# Altium PCB PCB1.PcbDoc
Units mm, origin at the board's own origin, x right, y up, seen from the top; angles counter-clockwise.
Board outline 152.4 x 101.6 mm, 2 copper layers (Top Layer, Bottom Layer); 27 components, 91 nets, 283 pads, 63 vias.
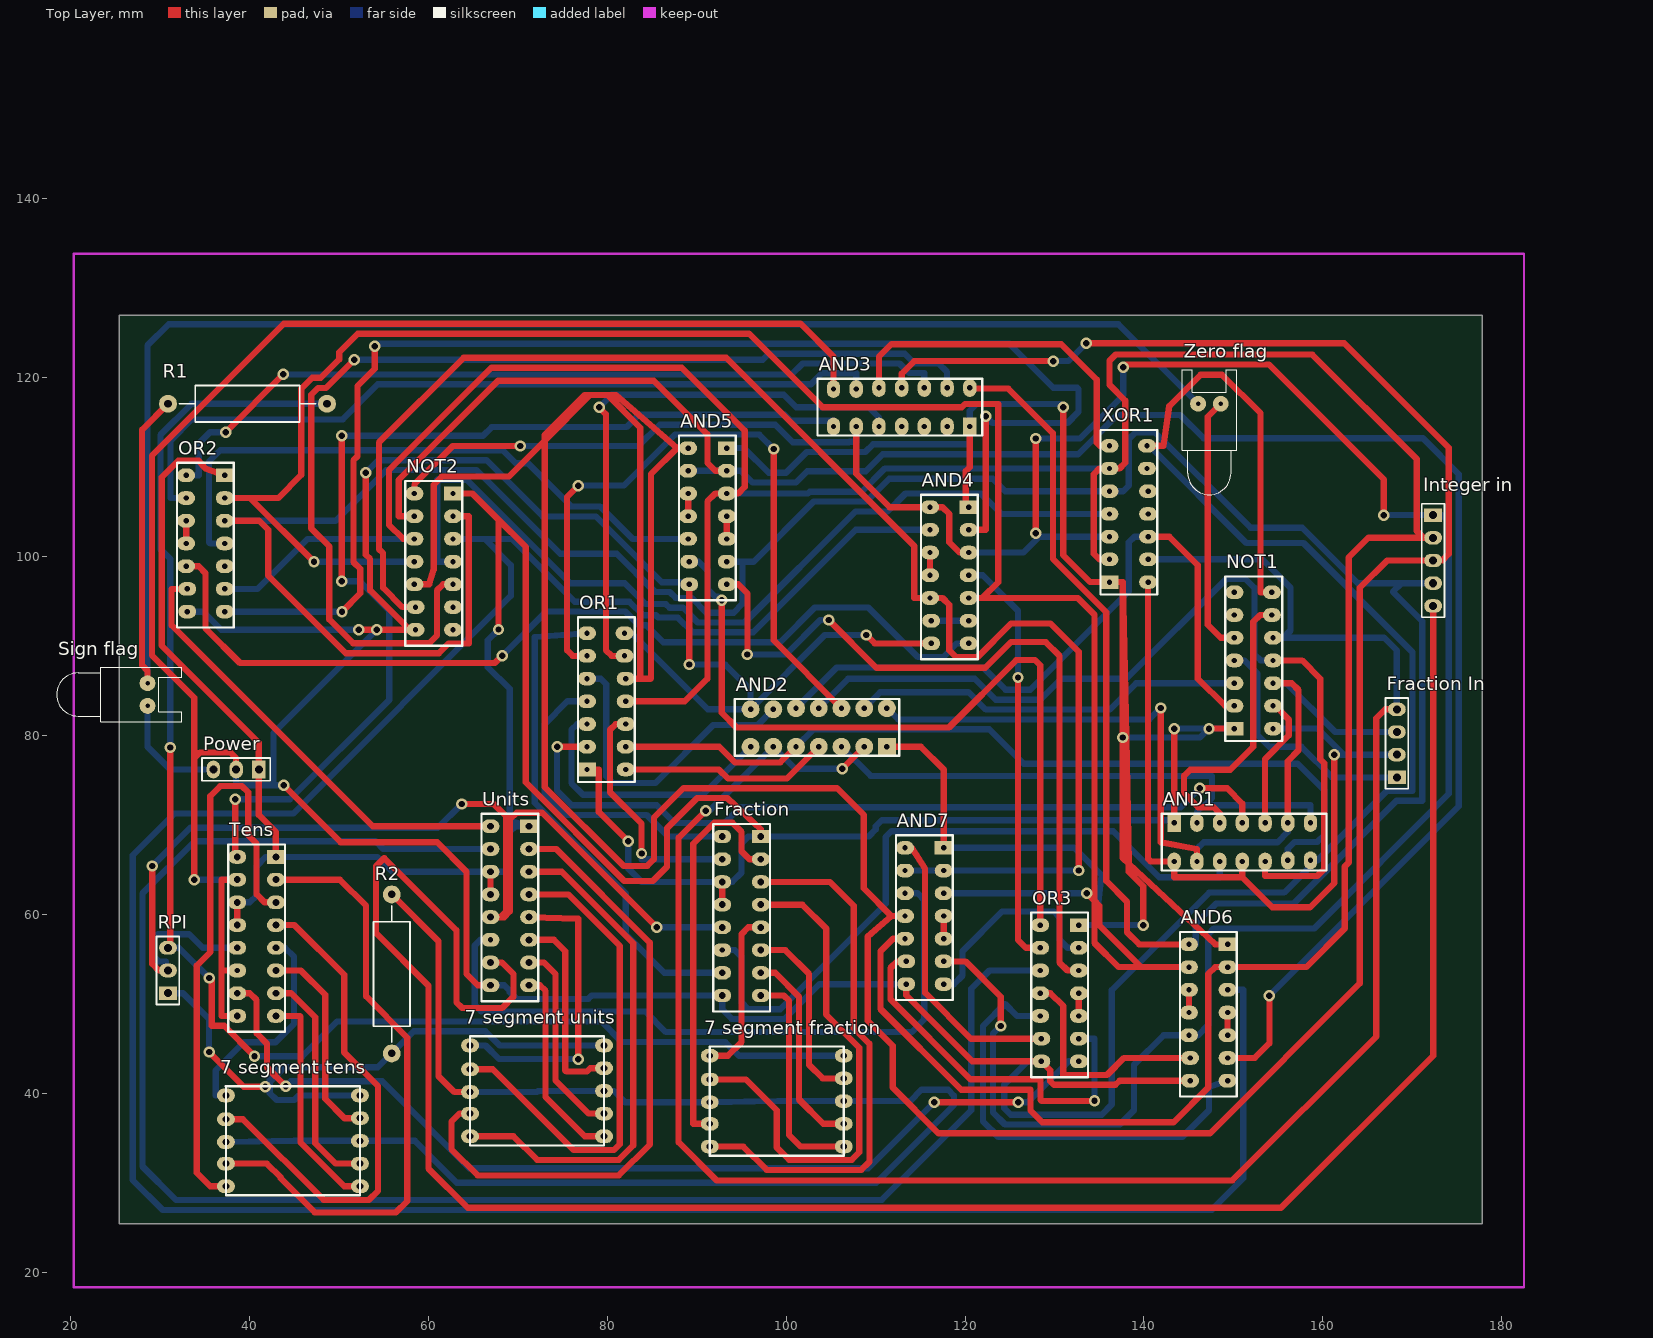
[diagram p0: Top Layer view]
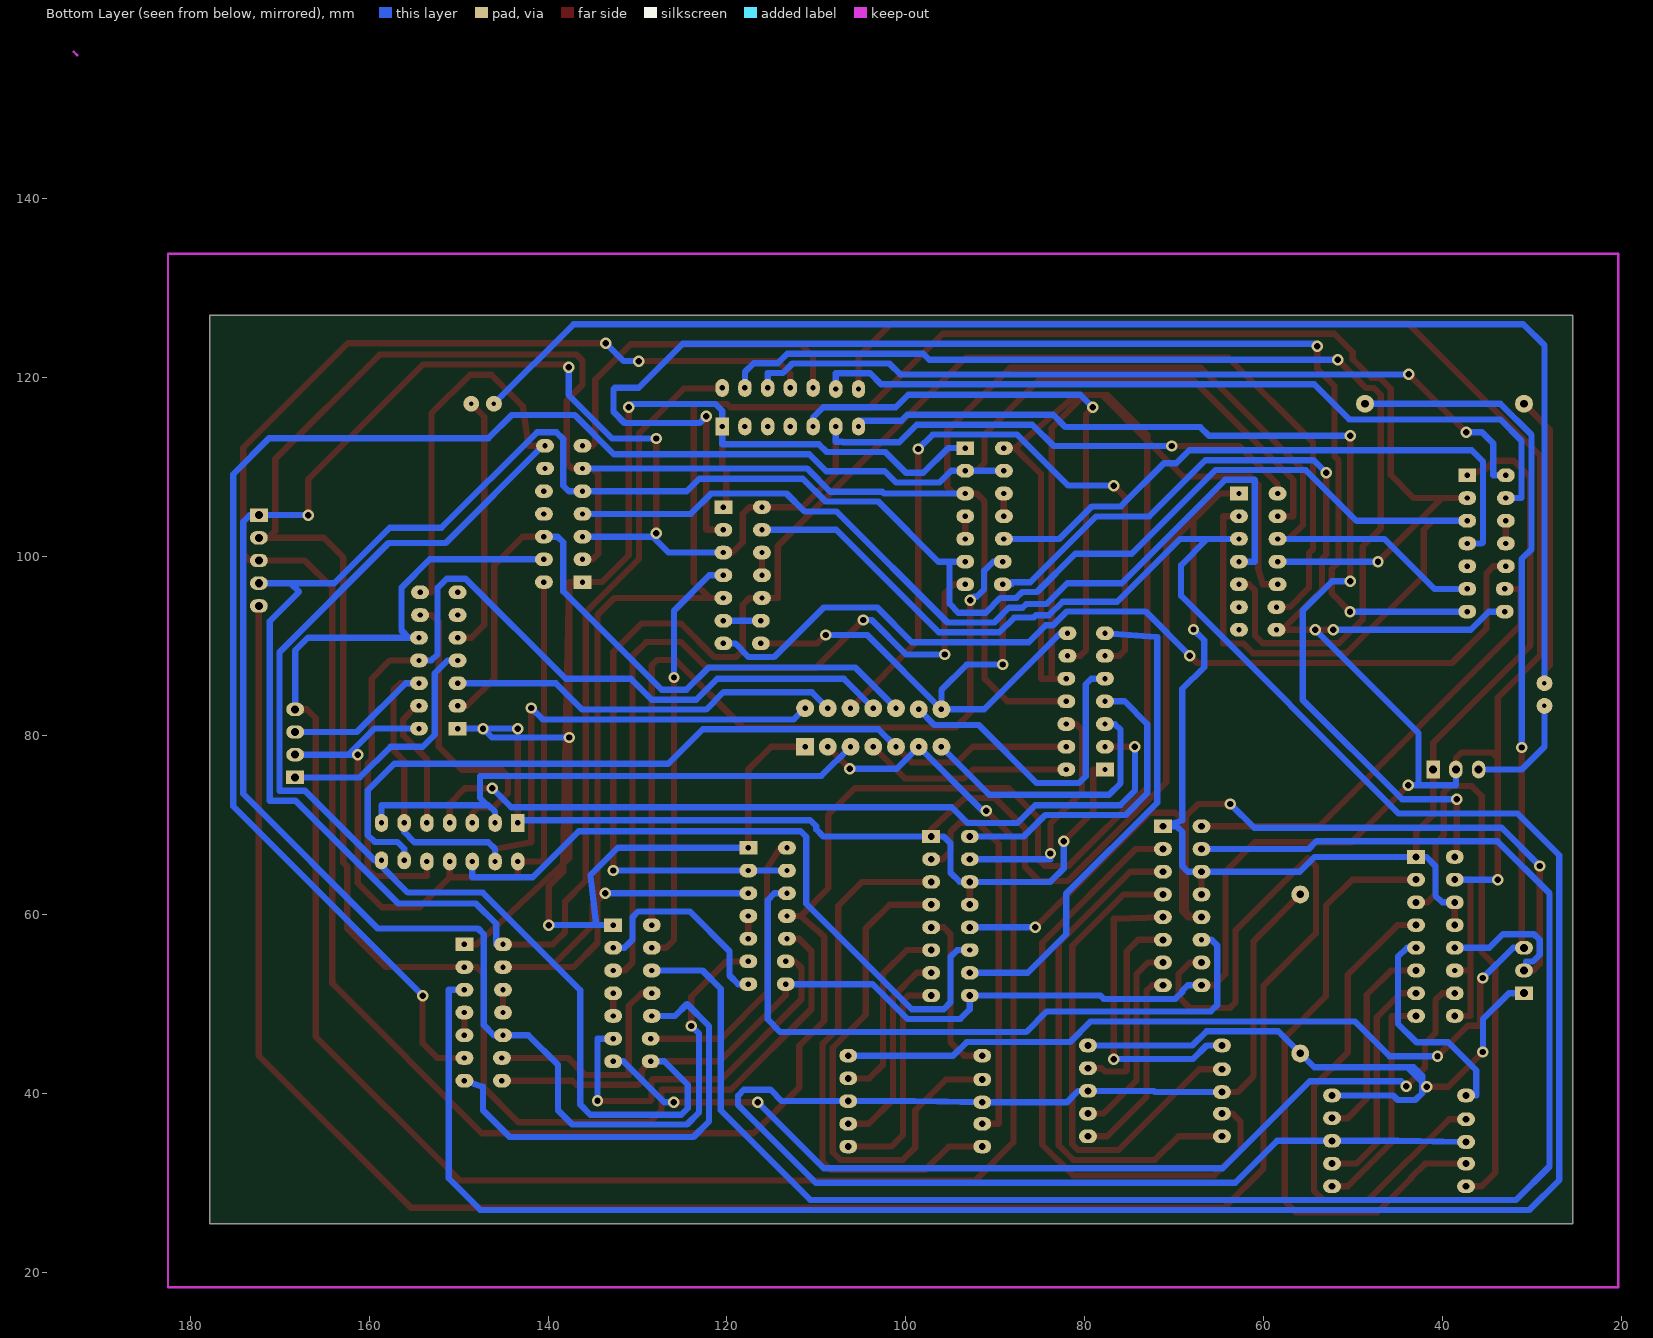
[diagram p1: Bottom Layer view, seen from below]

## Layer stack, top to bottom
Top Solder: solder mask 0.0102, Solder Resist, Dk 3.5
Top Layer: signal copper 0.0356
Dielectric 1: dielectric 0.32, FR-4, Dk 4.8
Bottom Layer: signal copper 0.0356
Bottom Solder: solder mask 0.0102, Solder Resist, Dk 3.5

## Board outline
25.4,25.4 177.8,25.4 177.8,127 25.4,127

## Design rules (kind name [scope] priority, off if disabled: settings)
Clearance [All] p1: gap=0.4 ignorepadtopadclearanceinfootprint=FALSE
HoleSize [All] p1: absolutevalues=TRUE maxlimit=2.54 minlimit=2 maxpercent=80.000 minpercent=20.000
PolygonConnect [All] p1: connectstyle=Relief reliefconductorwidth=0.254 reliefentries=4 polygonreliefangle="90 Angle" airgapwidth=0.254
RoutingVias [All] p1: holewidth=0.711 width=1.27 viastyle="Through Hole" minholewidth=0.711 minwidth=1.27 maxholewidth=0.711 maxwidth=1.27
SolderMaskExpansion [All] p1: expansion=0.102
Width [All] p1: maxlimit=1 minlimit=0.5 preferedwidth=0.7 minimp=50.000000 maximp=50.000000 favimp=50.000000
29 further rules are at their usual default settings.

## Components (designator, comment, footprint, x,y, rotation, side; value= is the part's Value field where it differs from the comment)
"7 segment fraction" "Component_1" "7 segment"#1 89.916,37.465 r90 top
"7 segment tens" "Component_1" "7 segment"#2 35.814,33.02 r90 top
"7 segment units" "Component_1" "7 segment"#2 63.119,38.608 r90 top
AND1 "Component_1" Gate?#1 143.891,67.691 r90 top
AND2 "Component_1" Gate?#2 110.744,81.28 r270 top
AND3 "Component_1" Gate?#1 120.015,117.094 r270 top
AND4 "Component_1" Gate?#3 117.856,105.029 r0 top
AND5 "Component_1" Gate?#3 90.805,111.633 r0 top
AND6 "Component_1" Gate?#3 146.812,56.134 r0 top
AND7 "Component_1" Gate?#3 115.062,66.929 r0 top
Fraction "Component_1" 7483#1 94.615,65.659 r0 top
"Fraction In" "Header 4" HDR1X4 168.275,75.311 r90 top
"Integer in" "Header 5" HDR1X5 172.339,104.648 r270 top
NOT1 "Component_1" Gate?#3 152.654,81.28 r180 top
NOT2 "Component_1" Gate?#3 60.198,106.553 r0 top
OR1 "Component_1" Gate?#3 80.264,76.708 r180 top
OR2 "Component_1" Gate?#3 34.671,108.585 r0 top
OR3 "Component_1" Gate?#3 130.175,58.293 r0 top
Power "Header 3" HDR1X3#1 41.021,76.2 r180 top
R1 "Res Adj1" AXIAL-0.7 39.751,117.094 r0 top value=1K
R2 "Res Adj1" AXIAL-0.7 55.88,53.34 r270 top value=1K
RPI "Header 3" HDR1X3#2 30.861,51.181 r90 top
"Sign flag" "LED0" LED-0 28.575,84.582 r270 top
Tens "Component_1" 7483#2 40.386,63.373 r0 top
Units "Component_1" 7483#3 68.707,66.802 r0 top
XOR1 "Component_1" Gate?#1 138.684,97.663 r180 top
"Zero flag" "LED0" LED-0 147.32,117.094 r0 top

## Footprints (in the part's own frame and the unit in brackets; to place one, negate y for a bottom-side part, rotate by r counter-clockwise, add the part's x,y. Pads: shape width x height; smd on the part's side, far side on the other; paste and mask are expansions set on the pad)
"7 segment"#1 [mil]
  oval 59.06x78.74 hole 30: a(160,-60) b(265,-60) c(165,-650) com(60,-60) com(65,-650) d(-35,-650) DP(265,-650) e(-135,-650) f(-35,-60) g(-135,-60)
  silkscreen extent -175,-650 305,-59
"7 segment"#2 [mil]
  oval 60x78.74 hole 30: a(160,-60) b(265,-60) c(165,-650) com(60,-60) com(65,-650) d(-35,-650) DP(265,-650) e(-135,-650) f(-35,-60) g(-135,-60)
  silkscreen extent -175,-650 305,-59
7483#1 [mil]
  oval 78.74x59.06 hole 30: A1(100,-480) A2(-70,-580) A3(-70,-80) A4(-70,120) B1(100,-380) B2(-70,-480) B3(-70,-180) C0(100,-180) C1(100,-580) C3(-70,20) C4(100,20) C5(100,-80) GND(100,-280) Vcc(-70,-280)
  rect 78.74x59.06 hole 30: B4(100,120)
  oval 78.74x59.06 hole 23.62: C2(-70,-380)
  silkscreen extent -110,-650 140,175
7483#2 [mil]
  oval 78.74x60 hole 30: A1(100,-480) A2(-70,-580) A3(-70,-80) A4(-70,120) B1(100,-380) B2(-70,-480) B3(-70,-180) C0(100,-180) C1(100,-580) C3(-70,20) C4(100,20) C5(100,-80) GND(100,-280) Vcc(-70,-280)
  rect 78.74x60 hole 30: B4(100,120)
  oval 78.74x60 hole 23.62: C2(-70,-380)
  silkscreen extent -110,-650 140,175
7483#3 [mil]
  oval 78.74x60.63 hole 30: A1(100,-480) A2(-70,-580) A3(-70,-80) A4(-70,120) B1(100,-380) B2(-70,-480) B3(-70,-180) C0(100,-180) C1(100,-580) C3(-70,20) C4(100,20) C5(100,-80) GND(100,-280) Vcc(-70,-280)
  rect 78.74x60.63 hole 30: B4(100,120)
  oval 78.74x60.63 hole 23.62: C2(-70,-380)
  silkscreen extent -110,-650 140,175
AXIAL-0.7 [mm] "Axial Device, Thru-Hole; 2 Leads; 0.7 in Pin Spacing"
  round 2 hole 0.85: 1(-8.89,0) 2(8.89,0)
  silkscreen extent -7.62,-2.03 7.62,2.03
Gate?#1 [mm]
  oval 2x1.5 hole 0.6: 1(-1.778,0.508) 2(-1.778,-2.032) 3(-1.778,-4.572) 4(-1.778,-7.112) 5(-1.778,-9.652) 6(-1.651,-12.192) 7(-1.651,-14.732) 8(2.54,-14.732) 9(2.54,-12.192) 10(2.54,-9.652) 11(2.54,-7.112) 12(2.54,-4.572) 13(2.54,-2.032)
  rect 2x1.5 hole 0.6: 14(2.54,0.508)
  silkscreen extent -2.79,-16.51 3.56,1.91
Gate?#2 [mm]
  round 2 hole 0.6: 1(-1.778,0.508) 2(-1.778,-2.032) 3(-1.778,-4.572) 4(-1.778,-7.112) 5(-1.778,-9.652) 6(-1.651,-12.192) 7(-1.651,-14.732) 8(2.54,-14.732) 9(2.54,-12.192) 10(2.54,-9.652) 11(2.54,-7.112) 12(2.54,-4.572) 13(2.54,-2.032)
  rect 2x2 hole 0.6: 14(2.54,0.508)
  silkscreen extent -2.79,-16.51 3.56,1.91
Gate?#3 [mm]
  oval 2x1.524 hole 0.6: 1(-1.778,0.508) 2(-1.778,-2.032) 3(-1.778,-4.572) 4(-1.778,-7.112) 5(-1.778,-9.652) 6(-1.651,-12.192) 7(-1.651,-14.732) 8(2.54,-14.732) 9(2.54,-12.192) 10(2.54,-9.652) 11(2.54,-7.112) 12(2.54,-4.572) 13(2.54,-2.032)
  rect 2x1.524 hole 0.6: 14(2.54,0.508)
  silkscreen extent -2.79,-16.51 3.56,1.91
HDR1X3#1 [mm] "Connector; Header; 3 Position"
  rect 1.5x2 hole 0.9: 1(0,0)
  oval 1.5x2 hole 0.9: 2(2.54,0) 3(5.08,0)
  silkscreen extent -1.27,-1.27 6.35,1.27
HDR1X3#2 [mm] "Connector; Header; 3 Position"
  rect 1.54x2 hole 0.9: 1(0,0)
  oval 1.54x2 hole 0.9: 2(2.54,0) 3(5.08,0)
  silkscreen extent -1.27,-1.27 6.35,1.27
HDR1X4 [mm] "Connector; Header; 4 Position"
  rect 1.5x2 hole 0.9: 1(0,0)
  oval 1.5x2 hole 0.9: 2(2.54,0) 3(5.08,0) 4(7.62,0)
  silkscreen extent -1.27,-1.27 8.89,1.27
HDR1X5 [mm] "Connector; Header; 5 Position"
  rect 1.5x2 hole 0.9: 1(0,0)
  oval 1.5x2 hole 0.9: 2(2.54,0) 3(5.08,0) 4(7.62,0) 5(10.16,0)
  silkscreen extent -1.27,-1.27 11.43,1.27
LED-0 [mil] "LED; 2 Leads"
  round 70 hole 19.68: 1(50,0) 2(-50,0)
  silkscreen extent -120,-400 120,150

## Part data
"Fraction In": "Header, 4-Pin", LatestRevisionDate=17-Jul-2002, LatestRevisionNote="Re-released for DXP Platform.", Publisher="Altium Limited"
"Integer in": "Header, 5-Pin", LatestRevisionDate=17-Jul-2002, LatestRevisionNote="Re-released for DXP Platform.", Publisher="Altium Limited"
Power RPI: "Header, 3-Pin", LatestRevisionDate=17-Jul-2002, LatestRevisionNote="Re-released for DXP Platform.", Publisher="Altium Limited"
R1 R2: "Variable Resistor", LatestRevisionDate=17-Jul-2002, LatestRevisionNote="Re-released for DXP Platform.", PackageDescription="Axial Device, Thru-Hole; 2 Leads; 0.7 in Pin Spacing", PackageReference=AXIAL-0.7, Published=8-Jun-2000, Publisher="Altium Limited", Set Position=0.5
"Sign flag" "Zero flag": "Typical INFRARED GaAs LED", LatestRevisionDate=08-Jul-2005, LatestRevisionNote="Mech Layer 1 removed.", PackageDescription="LED; 2 Leads", PackageReference=LED-0, Published=8-Jun-2000, Publisher="Altium Limited"

## Via types
v1: diameter 1.27, hole 0.711, Top Layer to Bottom Layer, 63 vias

## Nets (pads, with @x,y where several pads share a name; then routed paths per layer and width w, separated by ;. In a path a pad name is that pad's centre, name@x,y a point inside that pad or via, vN(x,y) a via of type N, cw(c..) or ccw(c..) an arc to the next point about the centre after c; other vN are vias at no path point)
0v: "7 segment fraction.DP" R1.2 RPI.3 | length 164.9
  Top Layer w0.7: RPI.3 31.115,56.261 v1(31.115,78.664) ; v1(35.458,52.883) 35.476,52.883 35.755,52.603 35.755,47.541 37.143,47.541 v1(40.538,44.145)
  Bottom Layer w0.7: RPI.3 32.08,56.261 v1(35.458,52.883) ; v1(31.115,78.664) 31.115,99.746 30.023,100.838 30.023,113.614 33.503,117.094 R1.2 ; v1(40.538,44.145) 45.898,44.145 49.784,48.031 79.324,48.031 81.636,45.72 93.193,45.72 94.717,44.196 106.426,44.196
2: Fraction.C3 OR1.3 | length 27
  Top Layer w0.7: OR1.3 80.924,81.28 80.289,80.645 80.289,73.66 83.82,70.13 v1(83.82,66.802)
  Bottom Layer w0.7: v1(83.82,66.802) 83.82,66.167 Fraction.C3
3: Fraction.A4 OR1.11 | length 35.4
  Bottom Layer w0.7: OR1.11 75.526,83.82 72.986,81.28 72.986,73.535 75.413,71.108 84.379,71.108 86.78,68.707 Fraction.A4
5v: "7 segment tens.DP" "7 segment units.DP" R2.2 RPI.1 | length 73.1
  Top Layer w0.7: v1(35.458,44.602) 39.345,40.716 v1(41.732,40.716)
  Bottom Layer w0.7: RPI.1 32.537,51.181 35.458,48.26 v1(35.458,44.602) ; v1(41.732,40.716) 42.24,41.224 ; 52.324,39.751 45.511,39.751 45.009,39.249 42.996,39.249 42.24,40.005 42.24,41.224 ; 79.629,45.339 67.949,45.339 66.36,46.928 58.358,46.928 R2.2 54.331,42.901 43.917,42.901 ; 42.24,41.224 43.917,42.901 ; 42.24,41.224 42.24,41.961 43.18,42.901 43.917,42.901
"7 seg led": "7 segment fraction.com" "7 segment tens.com" "7 segment units.com" R2.1 | length 170.2
  Top Layer w0.7: R2.1 61.112,56.998 61.112,41.91 62.89,40.132 64.643,40.132
  Bottom Layer w0.7: 37.338,34.544 44.958,34.671 52.324,34.671 58.471,34.671 63.144,29.997 110.072,29.997 118.745,38.671 118.745,39.739 118.11,40.374 115.113,40.374 113.855,39.116 106.426,39.116 99.06,39.116 91.44,38.989 81.966,38.989 80.696,40.259 79.629,40.259 72.263,40.259 72.136,40.132 64.643,40.132
(~Y&~X)+Z: AND4.13 OR2.8 | length 154.2
  Top Layer w0.7: v1(50.317,93.853) 52.363,95.898 52.363,98.642 51.599,99.405 51.599,110.757 52.045,111.203 52.045,119.075 53.975,121.006 v1(53.975,123.546) ; AND4.13 122.301,102.997 v1(122.301,115.697)
  Bottom Layer w0.7: OR2.8 v1(50.317,93.853) ; v1(53.975,123.546) 54.227,123.798 124.927,123.798 129.851,118.874 132.535,118.874 132.675,118.734 132.675,116.176 131.445,114.946 123.052,114.946 v1(122.301,115.697)
(~Z+X)&Y&~MSB: AND5.6 OR3.1 | length 87.9
  Top Layer w0.7: v1(92.786,95.123) 92.786,82.55 94.437,80.899 118.194,80.899 125.73,88.435 127.821,88.435 128.397,87.859 OR3.1
  Bottom Layer w0.7: AND5.6 90.221,99.441 91.237,98.425 91.237,96.342 92.075,95.504 92.405,95.504 v1(92.786,95.123)
"A out": OR2.3 OR2.4 | length 2.5
  Top Layer w0.7: OR2.4 OR2.3
C1: OR2.6 Units.A4 | length 50.8
  Top Layer w0.7: OR2.6 31.267,96.393 31.267,92.329 53.746,69.85 Units.A4
C2: OR3.3 Units.C3 | length 192.8
  Bottom Layer w0.7: Units.C3 54.94,67.31 54.077,68.174 33.839,68.174 28.011,62.346 28.011,31.806 31.75,28.067 110.664,28.067 120.697,38.1 120.697,51.688 122.729,53.721 OR3.3
C3: AND7.3 Units.C2 | length 76.6
  Bottom Layer w0.7: Units.C2 65.811,57.15 65.176,56.515 65.176,49.86 65.888,49.149 84.234,49.149 86.546,46.838 114.021,46.838 115.443,48.26 115.443,61.595 114.681,62.357 AND7.3
C3/~Y: AND7.1 OR3.6 | length 32.5
  Top Layer w0.7: AND7.1 114.046,67.437 115.519,65.126 115.519,51.227 120.645,46.101 OR3.6
C4: OR3.8 Tens.B2 | length 111.4
  Top Layer w0.7: Tens.B2 40.005,51.181 40.767,50.419 40.767,46.698 41.937,45.528 41.937,42.874 v1(44.044,40.767) ; v1(116.563,38.989) v1(125.933,38.989)
  Bottom Layer w0.7: v1(44.044,40.767) 44.602,41.326 54.813,41.326 64.541,31.598 109.172,31.598 v1(116.563,38.989) ; v1(125.933,38.989) 127,38.989 131.572,43.561 OR3.8
C4-YZ: OR3.10 OR3.11 | length 2.5
  Top Layer w0.7: OR3.10 OR3.11
C5: AND3.8 Tens.A4 | length 118.3
  Top Layer w0.7: v1(38.379,72.873) 38.379,66.421 Tens.A4 ; v1(50.288,97.257) v1(50.288,113.513)
  Bottom Layer w0.7: v1(38.379,72.873) 44.501,72.873 55.601,83.972 55.601,93.98 52.324,97.257 v1(50.288,97.257) ; v1(50.288,113.513) 66.089,113.513 67.068,114.491 82.132,114.491 83.5,115.859 99.83,115.859 100.482,115.207 105.283,115.207 AND3.8
CF0: "Fraction In.2" AND1.1 AND1.4 NOT1.1 XOR1.1 | length 88.3
  Top Layer w0.7: XOR1.1 140.462,66.218 140.767,65.913 AND1.1 143.383,64.16 151.003,64.16 ; AND1.4 151.003,64.16 ; v1(161.265,77.851) 161.265,63.5 158.572,60.808 154.356,60.808 151.003,64.16
  Bottom Layer w0.7: NOT1.1 159.41,80.772 162.331,77.851 ; v1(161.265,77.851) 162.331,77.851 ; 168.275,77.851 162.331,77.851
CF0&~CF1: AND1.6 AND2.10 OR1.2 | length 94.2
  Top Layer w0.7: OR1.2 92.507,78.74 94.259,76.987 99.339,76.987 AND2.10
  Bottom Layer w0.7: AND2.10 103.054,80.702 122.701,80.702 126.568,76.835 157.179,76.835 160.147,73.867 160.147,68.859 159.385,68.097 156.845,68.097 156.083,67.335 AND1.6
CF0&~CF1&CF2: AND2.8 OR1.12 | length 30.8
  Bottom Layer w0.7: OR1.12 76.606,81.28 75.971,80.645 75.971,74.676 77.267,73.381 90.653,73.381 AND2.8
CF0^CF2: AND2.5 NOT1.13 XOR1.3 | length 77.5
  Top Layer w0.7: XOR1.3 142.85,102.235 146.025,99.06 146.025,86.36 149.073,83.312 NOT1.13
  Bottom Layer w0.7: AND2.5 105.639,87.605 122.02,87.605 124.523,85.102 127.293,85.102 138.303,96.112 138.303,101.6 138.938,102.235 XOR1.3
CF1: "Fraction In.3" AND1.2 AND1.9 AND2.1 NOT1.3 | length 100.2
  Top Layer w0.7: v1(141.883,83.072) 141.883,68.072 145.923,67.31 AND1.2 ; NOT1.3 156.52,85.852 157.282,85.09 157.282,78.334 156.083,77.135 AND1.9
  Bottom Layer w0.7: AND2.1 112.508,81.802 140.613,81.802 v1(141.883,83.072) ; AND1.2 145.923,67.31 146.685,68.072 154.94,68.072 156.083,69.215 AND1.9 ; NOT1.3 155.905,85.852 161.366,80.391 168.275,80.391
CF1&~(CF0^CF2): AND2.3 OR1.9 | length 78.4
  Top Layer w0.7: v1(76.759,107.945) 75.489,106.675 75.489,89.535 76.124,88.9 OR1.9 ; v1(98.587,112.039) 98.587,90.643 AND2.3
  Bottom Layer w0.7: v1(76.759,107.945) 81.837,107.945 87.547,113.654 96.972,113.654 v1(98.587,112.039)
CF2: "Fraction In.4" AND2.9 AND2.13 NOT1.5 XOR1.2 | length 230
  Top Layer w0.7: v1(90.983,71.603) 87.96,68.58 87.96,34.493 92.202,30.251 149.885,30.251 165.964,46.33 165.964,81.915 166.98,82.931 168.275,82.931 ; v1(106.248,76.276) AND2.13
  Bottom Layer w0.7: v1(90.983,71.603) 91.415,71.603 AND2.9 101.016,76.276 v1(106.248,76.276) ; XOR1.2 153.213,99.695 156.388,96.52 156.388,91.745 155.575,90.932 ; NOT1.5 155.575,90.932 ; 168.275,82.931 168.275,89.51 166.853,90.932 155.575,90.932
Fa: "7 segment fraction.a" Fraction.C0 | length 58.2
  Top Layer w0.7: 91.44,41.529 95.504,41.529 98.933,38.1 98.933,33.933 100.33,32.536 107.315,32.536 108.176,33.397 108.176,45.085 104.47,48.791 104.47,58.42 101.803,61.087 Fraction.C0
Fb: "7 segment fraction.b" Fraction.GND | length 18.7
  Top Layer w0.7: 91.44,44.196 93.472,44.196 94.996,45.72 94.996,57.785 95.758,58.547 Fraction.GND
Fc: "7 segment fraction.c" Fraction.B1 | length 21.2
  Top Layer w0.7: Fraction.B1 99.873,56.007 102.54,53.34 102.54,43.18 104.064,41.656 106.426,41.656
Fd: "7 segment fraction.d" Fraction.A1 | length 23
  Top Layer w0.7: Fraction.A1 98.755,53.467 101.422,50.8 101.422,39.294 104.14,36.576 106.426,36.576
Fe: "7 segment fraction.e" Fraction.C1 | length 25.1
  Top Layer w0.7: Fraction.C1 99.72,50.927 100.319,50.328 100.319,35.317 101.6,34.036 106.426,34.036
Ff: "7 segment fraction.f" Fraction.C4 | length 44.6
  Top Layer w0.7: 91.44,36.576 89.611,36.576 89.611,67.894 91.948,70.231 93.98,70.231 94.996,69.215 94.996,67.056 95.885,66.167 Fraction.C4
Fg: "7 segment fraction.g" Fraction.C5 | length 60.2
  Top Layer w0.7: 91.44,34.036 95.199,34.036 97.815,31.42 108.407,31.42 109.296,32.309 109.296,45.52 107.544,47.273 107.544,60.96 104.877,63.627 Fraction.C5
GND: AND1.7 AND2.7 AND3.7 AND4.7 AND5.7 AND6.7 AND7.7 Fraction.A2 NOT1.7 NOT2.7 OR1.7 OR2.7 OR3.7 Power.2 Tens.A2 Tens.C2 Tens.C3 Units.A2 XOR1.7 | length 647.9
  Top Layer w0.7: v1(33.807,63.881) 33.807,77.47 ; Power.2 38.481,77.47 37.846,78.105 34.442,78.105 33.807,77.47 ; Tens.A2 36.855,48.641 36.855,53.721 ; Tens.C2 36.855,53.721 ; Tens.C3 36.855,63.881 36.855,53.721 ; v1(43.79,74.447) 50.165,68.072 60.96,68.072 64.237,64.795 64.237,53.34 65.507,52.07 Units.A2 ; v1(52.213,91.821) v1(54.204,91.821) NOT2.7@57.897,91.821 ; v1(52.984,109.372) 52.984,100.22 53.463,99.742 53.463,96.255 NOT2.7@57.897,91.821 ; NOT2.7 NOT2.7@57.897,91.821 ; v1(89.154,87.935) AND5.7 ; AND3.7 105.283,122.348 101.6,126.031 43.811,126.031 29.067,111.287 29.067,88.952 33.807,84.212 33.807,77.47 ; v1(108.941,91.237) 109.881,90.297 AND4.7 ; AND7.7 113.411,50.954 120.804,43.561 OR3.7 129.518,42.567 129.518,41.348 129.929,40.937 136.804,40.937 137.269,41.402 AND6.7 ; XOR1.7 142.189,112.395 142.824,116.84 146.329,120.345 148.717,120.345 153.035,116.027 153.035,96.012 NOT1.7
  Bottom Layer w0.7: OR2.7 34.798,93.853 36.83,91.821 v1(52.213,91.821) ; v1(33.807,63.881) Tens.C3 ; Power.2 38.481,74.447 42.672,74.447 ; v1(43.79,74.447) 42.672,74.447 ; v1(52.984,109.372) 54.397,110.785 66.487,110.785 72.773,104.499 78.717,104.499 86.071,97.145 88.162,97.145 88.162,96.901 AND5.7 ; v1(54.204,91.821) 42.672,80.289 42.672,74.447 ; Units.A2 68.453,52.07 69.088,51.435 69.088,51.304 69.85,50.542 77.847,50.542 78.232,50.927 Fraction.A2 92.837,49.37 93.904,48.303 99.814,48.303 103.708,52.197 AND7.7 ; OR1.7 82.705,91.44 91.214,82.931 AND2.7 ; v1(89.154,87.935) 93.167,87.935 96.012,85.09 AND2.7 ; v1(108.941,91.237) 104.318,91.237 AND2.7 ; OR3.7 127,43.561 124.384,40.945 124.384,38.315 125.095,37.604 135.267,37.604 136.398,38.735 136.398,51.537 147.295,62.433 155.666,62.433 158.623,65.39 AND1.7 159.408,66.04 167.178,73.811 170.028,73.811 170.028,89.332 157.836,101.524 151.46,101.524 140.589,112.395 XOR1.7
Led: "Sign flag.2" "Zero flag.2" R1.1 | length 192.6
  Top Layer w0.7: 28.575,85.852 28.575,87.244 27.967,87.852 27.967,114.2 R1.1
  Bottom Layer w0.7: 28.575,85.852 28.575,123.622 30.951,125.998 137.146,125.998 146.05,117.094
LSB: "Integer in.5" Units.B2 | length 241.3
  Top Layer w0.7: Units.B2 68.224,54.61 69.494,53.34 69.494,50.8 68.224,49.53 63.754,49.53 63.119,50.165 63.119,58.217 55.042,66.294 55.016,66.294 54.127,65.405 54.127,57.887 59.995,52.019 59.995,31.572 64.389,27.178 155.321,27.178 172.339,44.196 172.339,94.488
MSB: "Integer in.1" AND3.9 AND4.1 AND4.12 AND6.5 AND7.9 NOT2.1 XOR1.12 | length 295.3
  Top Layer w0.7: NOT2.1 58.42,108.077 62.713,112.37 v1(70.256,112.37) ; AND3.9 107.823,109.271 111.557,105.537 AND4.1 117.475,105.537 118.237,104.775 118.237,101.6 119.38,100.457 AND4.12 ; AND7.9 120.041,54.737 123.978,50.8 v1(123.978,47.523) ; v1(127.889,102.616) v1(127.889,113.208) ; v1(137.687,121.177) 138.003,121.493 153.97,121.493 166.827,108.636 v1(166.827,104.648)
  Bottom Layer w0.7: v1(70.256,112.37) 83.464,112.37 85.852,114.757 98.781,114.757 100.736,112.801 107.01,112.801 107.061,112.852 107.823,112.852 AND3.9 ; AND4.12 126.492,100.457 v1@128.27,102.235 ; v1(123.978,47.523) 123.106,46.651 123.106,37.858 124.46,36.504 137.291,36.504 138.887,38.1 138.887,43.18 142.189,46.482 AND6.5 146.05,46.482 147.193,47.625 147.193,57.785 147.828,58.42 159.037,58.42 174.092,73.475 174.092,103.911 173.355,104.648 172.339,104.648 v1(166.827,104.648) ; v1(127.889,102.616) v1@128.27,102.235 ; v1(127.889,113.208) 132.831,113.208 137.687,118.063 v1(137.687,121.177) ; XOR1.12 v1@128.27,102.235
MSB&((~Y&~X)+Z): AND4.11 OR3.2 | length 46.8
  Top Layer w0.7: v1(125.908,86.487) 125.908,57.15 126.797,56.261 OR3.2
  Bottom Layer w0.7: AND4.11 121.971,97.917 125.908,93.98 v1(125.908,86.487)
MSB&~X: AND4.3 AND4.4 | length 2.5
  Top Layer w0.7: AND4.4 AND4.3
MSB&~X&~Y: AND4.6 AND4.9 | length 4.2
  Bottom Layer w0.7: AND4.6 AND4.9
MSB&~X&~Y&~Z: AND4.8 OR2.5 | length 103.9
  Top Layer w0.7: OR2.5 34.29,98.933 35.052,98.171 35.052,91.973 38.916,88.109 67.424,88.109 v1(68.24,88.925)
  Bottom Layer w0.7: v1(68.24,88.925) 73.178,93.863 82.007,93.863 83.531,92.338 84.342,92.338 86.242,90.438 99.312,90.438 103.186,94.311 109.19,94.311 114.728,88.773 117.551,88.773 119.075,90.297 AND4.8
MSB&~Y&~Z: AND7.8 OR3.13 | length 23.2
  Bottom Layer w0.7: AND7.8 118.745,52.197 119.71,53.162 119.71,55.88 124.155,60.325 129.921,60.325 130.556,59.69 130.556,57.15 131.445,56.261 OR3.13
OutLSB: Fraction.B2 OR1.8 | length 55.9
  Bottom Layer w0.7: OR1.8 71.882,91.008 71.882,72.492 82.042,62.332 82.042,57.785 86.36,53.467 Fraction.B2
OutMSB: AND1.3 Fraction.C2 | length 77.8
  Bottom Layer w0.7: Fraction.C2 94.234,56.007 94.996,55.245 94.996,50.165 95.758,49.403 99.339,49.403 111.125,61.189 111.125,68.656 111.76,69.291 136.576,69.291 141.707,64.16 148.463,64.16 AND1.3
"RPI Switch": Fraction.Vcc RPI.2 Tens.Vcc Units.Vcc | length 124.8
  Top Layer w0.7: v1(29.108,65.405) 29.108,54.458 29.845,53.721 RPI.2 ; v1(63.703,72.339) 67.31,72.339 68.682,70.968 68.682,60.325 68.047,59.69 ; Units.Vcc 68.047,59.69 ; v1(85.522,58.547) 72.695,71.374 69.85,71.374 69.088,70.612 69.088,60.325 68.453,59.69 68.047,59.69
  Bottom Layer w0.7: v1(29.108,65.405) 33.376,69.672 61.036,69.672 v1(63.703,72.339) ; RPI.2 30.632,53.721 30.632,54.741 29.845,54.741 29.111,55.475 29.111,57.15 29.746,57.785 33.223,57.785 34.747,56.261 Tens.Vcc ; v1(85.522,58.547) Fraction.Vcc
Sign: "Sign flag.1" Power.3 | length 13
  Bottom Layer w0.7: 28.575,83.312 28.575,78.74 31.115,76.2 Power.3
Ta: "7 segment tens.a" Tens.C0 | length 56.8
  Top Layer w0.7: 37.338,37.084 39.243,37.084 48.26,28.067 53.34,28.067 54.356,29.083 54.356,40.767 50.571,44.552 50.571,53.238 45.009,58.801 Tens.C0
Tb: "7 segment tens.b" Tens.GND | length 24.8
  Bottom Layer w0.7: 37.338,39.751 36.195,39.751 36.195,42.553 39.35,45.708 42.889,45.708 44.958,47.777 44.958,55.245 43.942,56.261 Tens.GND
Tc: "7 segment tens.c" Tens.B1 | length 23.1
  Top Layer w0.7: Tens.B1 45.72,53.721 48.438,51.003 48.438,39.37 50.597,37.211 52.324,37.211
Td: "7 segment tens.d" Tens.A1 | length 25.5
  Top Layer w0.7: Tens.A1 44.628,51.181 47.32,48.489 47.32,34.417 49.606,32.131 52.324,32.131
Te: "7 segment tens.e" Tens.C1 | length 25.5
  Top Layer w0.7: Tens.C1 45.593,48.641 45.687,48.547 45.687,34.476 50.571,29.591 52.324,29.591
Tf: "7 segment tens.f" Tens.C4 | length 69.4
  Top Layer w0.7: 37.338,32.131 41.91,32.131 43.459,30.582 43.459,30.48 47.269,26.67 56.363,26.67 57.63,27.937 57.63,46.203 53.01,50.823 53.01,60.96 50.089,63.881 Tens.C4
Tg: "7 segment tens.g" Tens.C5 | length 66
  Top Layer w0.7: 37.338,29.591 35.585,29.591 34.073,31.103 34.073,54.274 35.585,55.786 35.585,73.228 36.703,74.346 39.141,74.346 39.827,73.66 39.827,68.834 40.767,67.894 40.767,62.23 41.656,61.341 Tens.C5
Ua: "7 segment units.a" Units.C0 | length 55.4
  Top Layer w0.7: 64.643,42.672 67.183,42.672 76.2,33.655 80.747,33.655 81.382,34.29 81.382,56.469 75.62,62.23 Units.C0
Ub: "7 segment units.b" Units.GND | length 33.9
  Top Layer w0.7: Units.GND 76.749,59.522 v1(76.749,43.815)
  Bottom Layer w0.7: 64.643,45.339 66.37,45.339 67.894,43.815 v1(76.749,43.815)
Uc: "7 segment units.c" Units.B1 | length 22.5
  Top Layer w0.7: Units.B1 74.016,57.15 75.286,55.88 75.286,42.545 75.413,42.418 77.699,42.418 78.08,42.799 79.629,42.799
Ud: "7 segment units.d" Units.A1 | length 22.3
  Top Layer w0.7: Units.A1 72.916,54.61 74.186,53.34 74.186,41.453 77.919,37.719 79.629,37.719
Ue: "7 segment units.e" Units.C1 | length 22.3
  Top Layer w0.7: Units.C1 72.451,52.07 73.086,51.435 73.086,39.563 77.47,35.179 79.629,35.179
Uf: "7 segment units.f" Units.C4 | length 70.8
  Top Layer w0.7: 64.643,37.719 63.449,37.719 62.56,36.83 62.56,33.757 65.512,30.805 81.28,30.805 84.734,34.259 84.734,56.849 74.273,67.31 Units.C4
Ug: "7 segment units.g" Units.C5 | length 57.6
  Top Layer w0.7: 64.643,35.179 69.494,35.179 72.136,32.537 81.28,32.537 82.9,34.157 82.9,56.769 74.899,64.77 Units.C5
Vcc: AND1.14 AND2.14 AND3.14 AND4.14 AND5.14 AND6.14 AND7.14 Fraction.A3 Fraction.B3 Fraction.B4 NOT1.14 NOT2.14 OR1.14 OR2.14 OR3.14 Power.1 Tens.A3 Tens.B3 Tens.B4 Units.A3 Units.B3 Units.B4 XOR1.14 | length 541.7
  Top Layer w0.7: OR2.14 35.052,109.855 34.29,110.719 32.007,110.719 30.167,108.879 30.167,90.052 41.021,79.198 Power.1 41.021,71.12 42.926,69.215 Tens.B4 ; Tens.B3 Tens.A3 ; NOT2.14 64.897,107.061 67.818,104.14 ; Units.B3 Units.A3 ; v1(67.818,91.846) 67.818,104.14 ; OR1.14 79.045,76.2 79.045,71.45 v1(82.321,68.174) ; Fraction.B3 Fraction.A3 ; Fraction.B4 97.155,69.52 93.396,73 90.018,73 86.665,69.647 86.665,65.303 85.09,63.729 81.896,63.729 70.866,74.758 70.866,101.092 67.818,104.14 ; AND2.14 115.062,78.74 117.602,76.2 AND7.14 ; AND4.14 120.084,105.537 120.084,109.568 120.523,110.006 AND3.14 ; v1(130.962,116.713) 130.962,100.178 133.985,97.155 XOR1.14 137.617,97.155 ; v1(137.617,79.781) v1@137.612,79.781 ; v1(139.929,58.801) 139.929,63.144 138.303,64.77 138.285,65.666 ; AND1.14 v1(143.383,80.772) ; v1(147.269,80.772) NOT1.14 ; AND6.14 147.955,56.642 138.285,65.666 ; v1@137.612,79.781 137.617,97.155 ; v1@137.612,79.781 137.612,66.294 138.285,65.666 ; 137.617,97.155 137.668,97.155 138.009,79.789 138.285,65.666
  Bottom Layer w0.7: Tens.A3 40.005,61.341 40.767,62.103 40.767,65.405 41.783,66.421 Tens.B4 54.28,66.421 55.931,64.77 Units.A3 68.453,64.77 69.088,65.405 69.088,69.215 69.723,69.85 Units.B4 69.088,70.485 69.088,85.217 66.624,87.63 66.624,90.653 v1(67.818,91.846) ; v1(82.321,68.174) 82.321,65.126 83.82,63.627 Fraction.A3 93.98,63.627 94.996,64.643 94.996,67.945 95.758,68.707 Fraction.B4 109.22,68.707 110.007,69.494 110.007,69.85 110.693,70.536 143.383,70.536 AND1.14 ; AND5.14 95.275,112.141 98.032,109.384 99.972,109.384 102.289,111.701 108.841,111.701 109.713,112.573 120.523,112.573 AND3.14 120.523,116.32 121.285,117.082 130.593,117.082 v1(130.962,116.713) ; AND7.14 132.182,67.437 135.255,64.364 134.62,58.801 ; OR3.14 134.62,58.801 ; v1(137.617,79.781) 146.279,79.781 v1(147.269,80.772) ; v1(139.929,58.801) 134.62,58.801 ; v1(143.383,80.772) v1(147.269,80.772) ; NOT1.14 v1(147.269,80.772)
X: "Integer in.4" AND3.1 AND5.9 AND6.1 NOT2.13 OR2.12 XOR1.10 | length 359.3
  Top Layer w0.7: OR2.12 41.046,104.013 42.062,102.997 42.062,97.888 50.741,89.209 61.159,89.209 62.247,90.297 64.491,90.297 64.491,104.521 NOT2.13 ; AND3.1 120.523,118.796 124.84,118.796 129.819,113.816 129.819,99.746 135.788,93.777 135.788,63.742 138.1,61.431 138.1,58.014 139.471,56.642 AND6.1
  Bottom Layer w0.7: OR2.12 49.606,104.013 55.278,109.685 65.372,109.685 74.727,100.33 81.034,100.33 85.319,96.045 86.974,96.045 87.63,95.389 89.408,95.389 91.059,93.738 94.119,93.738 95.098,94.717 95.098,99.441 ; AND5.9 95.098,99.441 ; AND6.1 145.796,56.642 145.796,58.928 148.082,61.214 156.743,61.214 168.24,72.711 171.128,72.711 171.128,92.778 167.843,96.063 168.808,97.028 ; 172.339,97.028 168.808,97.028 ; 95.098,99.441 96.348,99.441 103.073,106.166 108.96,106.166 111.505,108.711 123.088,108.711 124.484,107.315 XOR1.10 137.668,107.315 138.303,107.95 138.303,113.157 139.065,113.919 141.224,113.919 151.917,103.226 157.709,103.226 163.906,97.028 168.808,97.028
X&Z&~MSB: AND5.8 OR3.12 | length 86.9
  Top Layer w0.7: AND5.8 94.64,96.901 95.656,95.885 v1(95.656,89.052) ; v1(104.75,92.913) 110.084,87.579 122.25,87.579 125.12,90.449 129.007,90.449 130.556,88.9 130.556,54.61 131.445,53.721 OR3.12
  Bottom Layer w0.7: v1(95.656,89.052) 99.924,89.052 103.784,92.913 v1(104.75,92.913)
X&~(Z^MSB): AND3.3 OR2.1 | length 91.9
  Top Layer w0.7: v1(37.31,113.919) v1(43.771,120.379)
  Bottom Layer w0.7: OR2.1 34.29,109.093 34.29,112.649 35.56,113.919 v1(37.31,113.919) ; v1(43.771,120.379) 100.631,120.379 101.849,121.598 112.664,121.598 113.721,120.541 115.443,120.541 AND3.3
X&~Z: AND6.3 AND6.4 | length 2.5
  Top Layer w0.7: AND6.4 AND6.3
X&~Z&MSB: AND6.6 OR3.4 | length 25.9
  Top Layer w0.7: OR3.4 129.54,51.181 130.962,49.759 130.962,42.037 135.865,42.037 137.77,43.942 AND6.6
X^Z: AND3.5 XOR1.8 | length 38.7
  Top Layer w0.7: AND3.5 110.363,122.352 111.76,123.749 130.759,123.749 134.706,119.802 134.706,112.741 135.052,112.395 XOR1.8
Y: "Integer in.3" AND3.4 AND5.1 AND7.4 NOT2.5 OR1.5 | length 437.5
  Top Layer w0.7: NOT2.5 60.071,96.901 60.579,98.527 60.579,108.052 61.481,108.953 68.974,108.953 72.986,112.966 ; OR1.5 83.668,86.36 ; AND5.1 87.782,112.141 ; AND3.4 112.903,120.472 114.3,121.869 v1(129.87,121.869) ; AND7.4 111.76,59.817 ; v1(133.543,123.866) 162.392,123.866 174.092,112.166 174.092,100.305 173.355,99.568 172.339,99.568 167.183,99.568 164.135,96.52 164.135,52.273 147.396,35.535 117.018,35.535 111.912,40.64 111.912,45.314 109.118,48.108 109.118,57.531 111.76,59.817 ; 72.986,112.966 78.105,118.085 ; 72.986,112.966 72.986,113.601 77.47,118.085 78.105,118.085 ; 72.986,112.966 72.986,74.232 81.801,65.417 84.455,65.417 85.205,66.167 85.205,70.811 88.495,74.101 105.68,74.101 108.661,71.12 108.661,62.916 111.76,59.817 ; 78.105,118.085 80.01,118.085 ; 80.01,118.085 80.95,118.085 87.782,112.141 ; 80.01,118.085 83.668,114.427 83.668,86.36 ; 83.668,86.36 84.811,86.36 84.861,86.411 84.861,109.22 87.782,112.141
  Bottom Layer w0.7: v1(129.87,121.869) 131.547,121.869 v1(133.543,123.866)
Y&(X^Z): AND3.6 OR2.2 | length 89.7
  Bottom Layer w0.7: OR2.2 31.143,106.553 31.143,112.954 33.531,115.341 50.394,115.341 54.331,119.278 102.768,119.278 103.988,120.498 107.823,120.498 AND3.6
Y&Z: AND7.6 OR3.9 | length 43.1
  Top Layer w0.7: AND7.6 112.395,54.737 111.658,54 111.658,50.506 120.591,41.574 128.318,41.574 128.418,41.474 128.418,39.274 128.551,39.141 v1(134.468,39.141)
  Bottom Layer w0.7: OR3.9 134.468,46.101 v1(134.468,39.141)
Y&~MSB: AND5.3 AND5.4 | length 2.5
  Top Layer w0.7: AND5.4 AND5.3
Z: "Integer in.2" AND5.12 AND6.13 AND7.5 NOT2.3 OR1.4 OR2.9 XOR1.9 XOR1.13 | length 378.1
  Top Layer w0.7: NOT2.3 57.15,101.981 55.57,103.561 55.57,109.673 67.033,121.136 88.313,121.136 95.352,114.098 95.352,107.798 94.615,107.061 AND5.12 92.075,107.061 91.186,106.172 91.186,86.36 88.646,83.82 OR1.4 ; AND7.5 111.938,57.277 110.541,55.88 110.541,49.418 119.573,40.386 127.306,40.386 127.318,40.374 127.318,38.061 128.626,36.754 143.307,36.754 147.193,40.64 147.193,53.34 147.955,54.102 AND6.13 158.14,54.102 162.458,58.42 162.458,65.355 162.906,65.802 162.906,99.914 165.1,102.108 171.272,102.108 ; XOR1.13 135.026,99.695 134.391,100.33 134.391,109.22 135.026,109.855 XOR1.9 137.262,109.855 137.897,110.49 137.897,117.45 136.144,119.202 136.144,121.92 136.817,122.593 158.839,122.593 170.51,110.922 170.51,102.87 171.272,102.108 ; 172.339,102.108 171.272,102.108
  Bottom Layer w0.7: OR2.9 40.882,96.393 46.47,101.981 NOT2.3 ; AND5.12 102.413,107.061 102.618,107.266 108.439,107.266 111.028,109.855 XOR1.9
Z&~MSB: AND5.10 AND5.11 | length 2.5
  Top Layer w0.7: AND5.10 AND5.11
Z&~X: AND6.10 AND6.11 | length 2.5
  Top Layer w0.7: AND6.10 AND6.11
Z&~X&~MSB: AND6.8 OR3.5 | length 50.7
  Bottom Layer w0.7: OR3.5 125.794,48.641 124.46,49.975 122.006,47.522 122.006,36.83 123.734,35.103 144.272,35.103 147.269,38.1 147.269,40.716 AND6.8
Z+Y: AND3.10 OR1.6 | length 63.8
  Top Layer w0.7: v1(79.07,116.688) 79.832,115.926 79.832,89.535 80.467,88.9 OR1.6
  Bottom Layer w0.7: v1(79.07,116.688) 80.493,118.11 99.72,118.11 101.117,116.713 109.22,116.713 110.363,115.57 AND3.10
Z^MSB: NOT2.11 XOR1.11 | length 99.6
  Bottom Layer w0.7: NOT2.11 60.985,99.441 60.985,108.585 64.287,108.585 75.844,97.028 81.953,97.028 84.28,94.701 86.542,94.701 86.954,94.289 88.464,94.289 90.115,92.638 95.33,92.638 107.747,105.054 111.328,105.054 113.335,107.061 121.768,107.061 124.054,104.775 XOR1.11
"Zero flag": "Zero flag.1" NOT1.10 | length 28.9
  Top Layer w0.7: 148.59,117.094 147.142,115.646 147.142,92.38 148.59,90.932 NOT1.10
~(CF0^CF2): AND2.2 NOT1.12 | length 44.2
  Bottom Layer w0.7: AND2.2 110.49,84.836 120.389,84.836 122.323,82.902 136.166,82.902 139.116,85.852 NOT1.12
~(Z^MSB): AND3.2 NOT2.10 | length 122.2
  Top Layer w0.7: v1(51.689,122.022) 48.514,118.847 47.625,118.847 46.891,118.113 46.891,103.147 48.895,101.143 48.895,92.977 51.563,90.309 60.071,90.309 60.935,91.173 60.935,96.215 61.62,96.901 NOT2.10
  Bottom Layer w0.7: v1(51.689,122.022) 97.368,122.022 98.044,122.698 113.243,122.698 114.3,121.641 116.992,121.641 117.983,120.65 AND3.2
~CF0: AND1.10 NOT1.2 | length 15
  Top Layer w0.7: AND1.10 153.543,77.371 156.182,80.01 156.182,81.791 154.661,83.312 NOT1.2
~CF0&CF1: AND1.8 AND1.13 AND2.12 | length 62.6
  Bottom Layer w0.7: AND2.12 109.435,75.477 147.613,75.477 147.613,73.025 146.8,72.212 ; AND1.13 145.923,71.45 146.685,72.212 146.8,72.212 ; AND1.8 158.623,72.212 146.8,72.212
~CF0&CF1&CF2: AND2.11 OR1.1 | length 23.5
  Top Layer w0.7: OR1.1 92.473,76.2 93.472,75.201 100.093,75.201 AND2.11
~CF0&CF1&~CF2: AND1.11 OR1.13 | length 90.9
  Top Layer w0.7: v1(74.371,78.74) OR1.13 ; v1(146.228,74.092) 149.301,74.092 151.003,72.39 AND1.11
  Bottom Layer w0.7: v1(74.371,78.74) 74.371,73.838 75.997,72.212 85.523,72.212 87.528,70.207 93.067,70.207 94.844,71.984 144.12,71.984 v1(146.228,74.092)
~CF1: AND1.5 AND2.4 NOT1.4 | length 103
  Top Layer w0.7: AND1.5 153.543,64.287 159.385,64.287 160.147,65.049 160.147,76.911 159.715,77.343 159.715,86.36 157.683,88.392 NOT1.4
  Bottom Layer w0.7: AND2.4 106.913,86.339 121.086,86.339 123.423,84.002 128.393,84.002 130.73,86.339 138.028,86.339 149.225,97.536 151.333,97.536 152.349,96.52 152.349,89.078 153.035,88.392 NOT1.4
~CF1&(CF0^CF2): AND2.6 OR1.10 | length 35.1
  Bottom Layer w0.7: OR1.10 79.248,86.36 79.883,85.725 79.883,75.438 80.645,74.676 85.344,74.676 91.846,81.178 96.799,81.178 AND2.6
~CF2: AND1.12 NOT1.6 | length 33.4
  Top Layer w0.7: AND1.12 148.463,71.298 147.78,71.981 146.05,71.981 144.483,73.548 144.483,75.489 145.169,76.175 149.657,76.175 152.222,78.74 152.222,92.71 152.984,93.472 NOT1.6
~MSB: AND5.2 AND5.13 AND6.9 NOT2.2 | length 223.5
  Top Layer w0.7: NOT2.2 56.67,104.521 56.67,108.583 67.769,119.682 85.19,119.682 91.186,113.686 91.186,110.49 92.075,109.601 AND5.13 ; AND6.9 152.4,43.942 154.026,45.568 v1(154.026,50.917)
  Bottom Layer w0.7: AND5.2 AND5.13 94.924,109.601 96.241,108.284 101.072,108.284 102.342,109.554 108.894,109.554 110.789,111.449 132.628,111.449 137.015,115.836 144.057,115.836 146.665,113.228 171.201,113.228 175.209,109.22 175.209,72.1 v1(154.026,50.917)
~X: AND4.2 AND6.12 NOT2.12 | length 310.5
  Bottom Layer w0.7: NOT2.12 66.294,101.981 ; AND4.2 107.775,102.997 96.316,91.538 89.539,91.538 87.888,93.189 85.691,93.189 85.442,93.438 83.987,93.438 82.462,94.963 76.335,94.963 69.317,101.981 66.294,101.981 ; AND6.12 151.105,51.562 151.105,30.48 147.574,26.949 30.251,26.949 26.911,30.29 26.911,66.599 31.583,71.272 44.856,71.272 69.215,95.631 69.215,99.06 66.294,101.981
~Y: AND4.5 AND7.2 AND7.13 NOT2.6 | length 170.2
  Top Layer w0.7: NOT2.6 57.074,94.361 54.915,96.52 54.915,100.384 54.458,100.842 54.458,112.776 63.918,122.236 93.283,122.236 114.325,101.194 114.325,95.377 AND4.5 117.475,95.377 118.237,94.615 118.237,89.535 118.999,88.773 121.387,88.773 125.146,92.532 129.54,92.532 132.715,89.357 v1(132.715,64.897)
  Bottom Layer w0.7: AND7.2 AND7.13 v1(132.715,64.897)
~Y&~X: OR2.10
~Y&~Z: AND7.10 AND7.11 | length 2.5
  Top Layer w0.7: AND7.10 AND7.11
~Z: AND4.10 AND6.2 AND7.12 NOT2.4 OR2.13 | length 237.5
  Top Layer w0.7: OR2.13 40.081,106.553 ; v1(47.193,99.441) 40.081,106.553 ; AND4.10 121.92,95.377 ; v1(133.616,62.357) 134.468,61.505 ; AND6.2 139.7,54.102 ; 40.081,106.553 43.18,106.553 45.771,109.144 45.771,118.776 46.99,119.995 47.935,119.995 49.999,122.059 49.999,122.86 52.07,124.931 95.846,124.931 104.064,116.713 119.622,116.713 119.991,117.082 123.693,117.082 123.693,97.15 121.92,95.377 ; 121.92,95.377 132.613,95.377 134.468,93.523 134.468,61.505 ; 134.468,61.505 134.468,56.794 137.16,54.102 139.7,54.102 ; 134.468,61.505 135.001,60.972 135.001,58.801 139.7,54.102
  Bottom Layer w0.7: v1(47.193,99.441) NOT2.4 ; AND7.12 v1(133.616,62.357)
~Z+X: AND5.5 OR2.11 | length 69
  Bottom Layer w0.7: OR2.11 35.611,101.473 35.461,101.623 35.461,110.645 36.703,111.887 68.301,111.887 69.748,110.439 71.12,110.439 75.946,105.613 79.172,105.613 82.804,101.981 AND5.5
"~Zero flag": "Fraction In.1" NOT1.11 | length 27.6
  Bottom Layer w0.7: NOT1.11 151.206,88.392 152.654,86.944 152.654,80.086 154,78.74 157.607,78.74 161.036,75.311 168.275,75.311
pads on no net: AND3.11 AND3.12 AND3.13 NOT1.8 NOT1.9 NOT2.8 NOT2.9 XOR1.4 XOR1.5 XOR1.6

## Keep-outs
Bottom Layer:
  lines w0.254: 192.659,156.083 193.04,156.464
Keep-Out Layer:
  lines w0.254: 20.32,18.288 182.499,18.288 182.499,133.858 20.32,133.858 20.32,18.288